# EAGLE board picoKey_2304 (EAGLE 9.6.2)
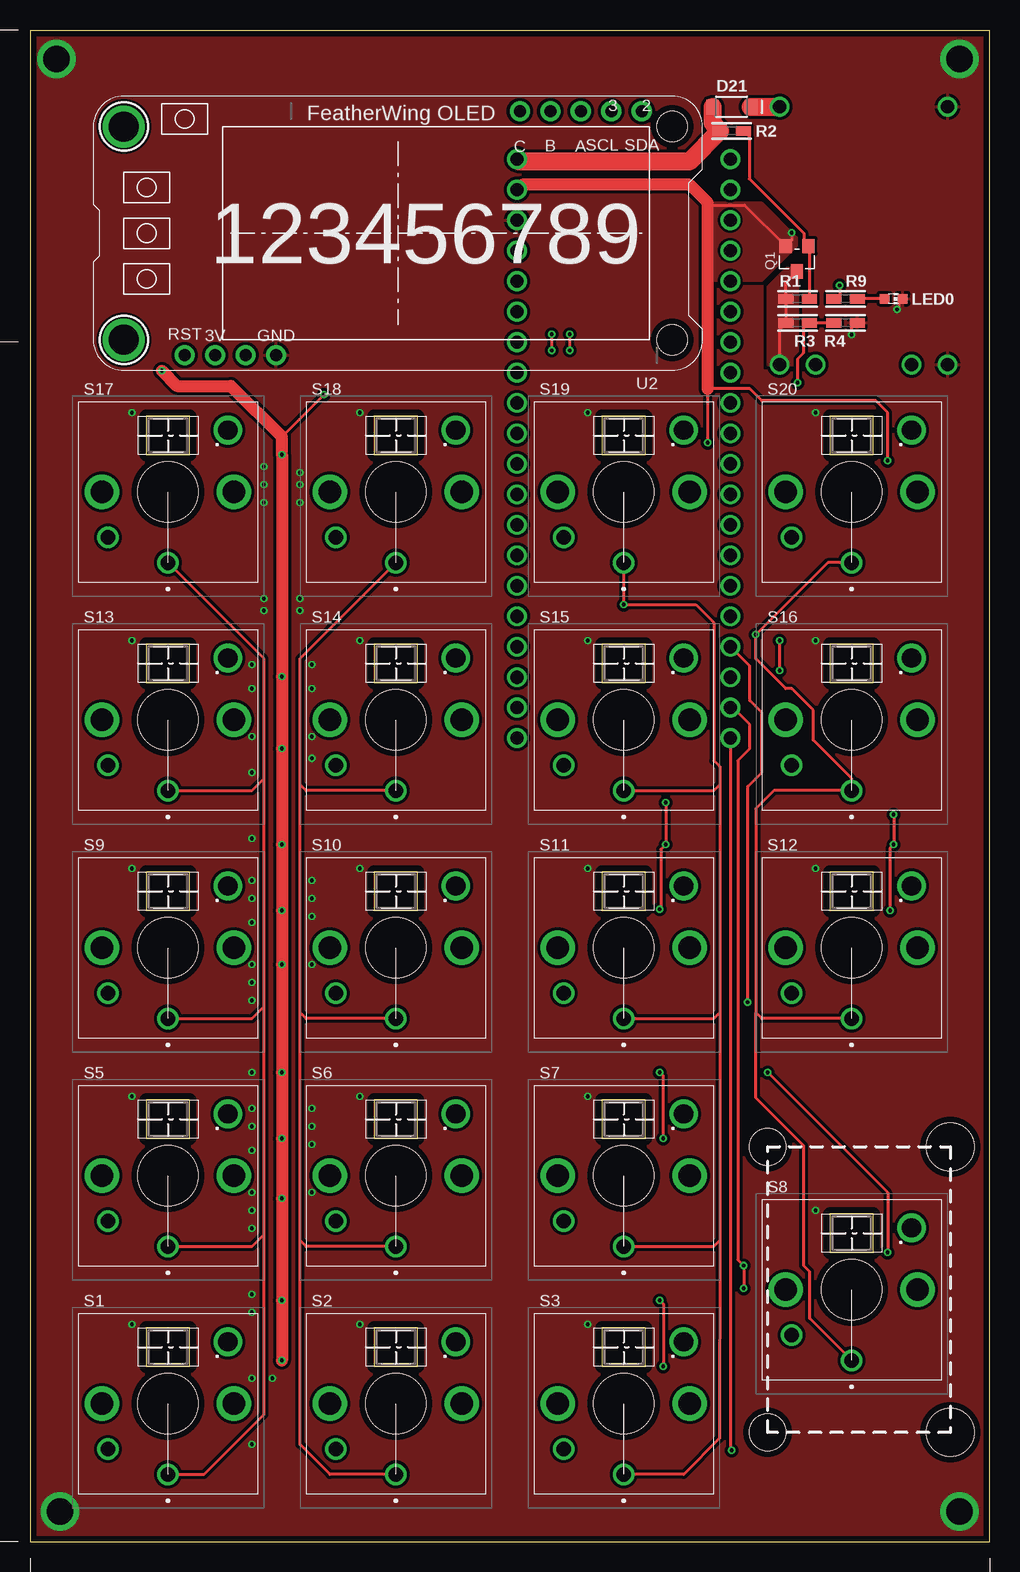
[diagram p0: board, top side]
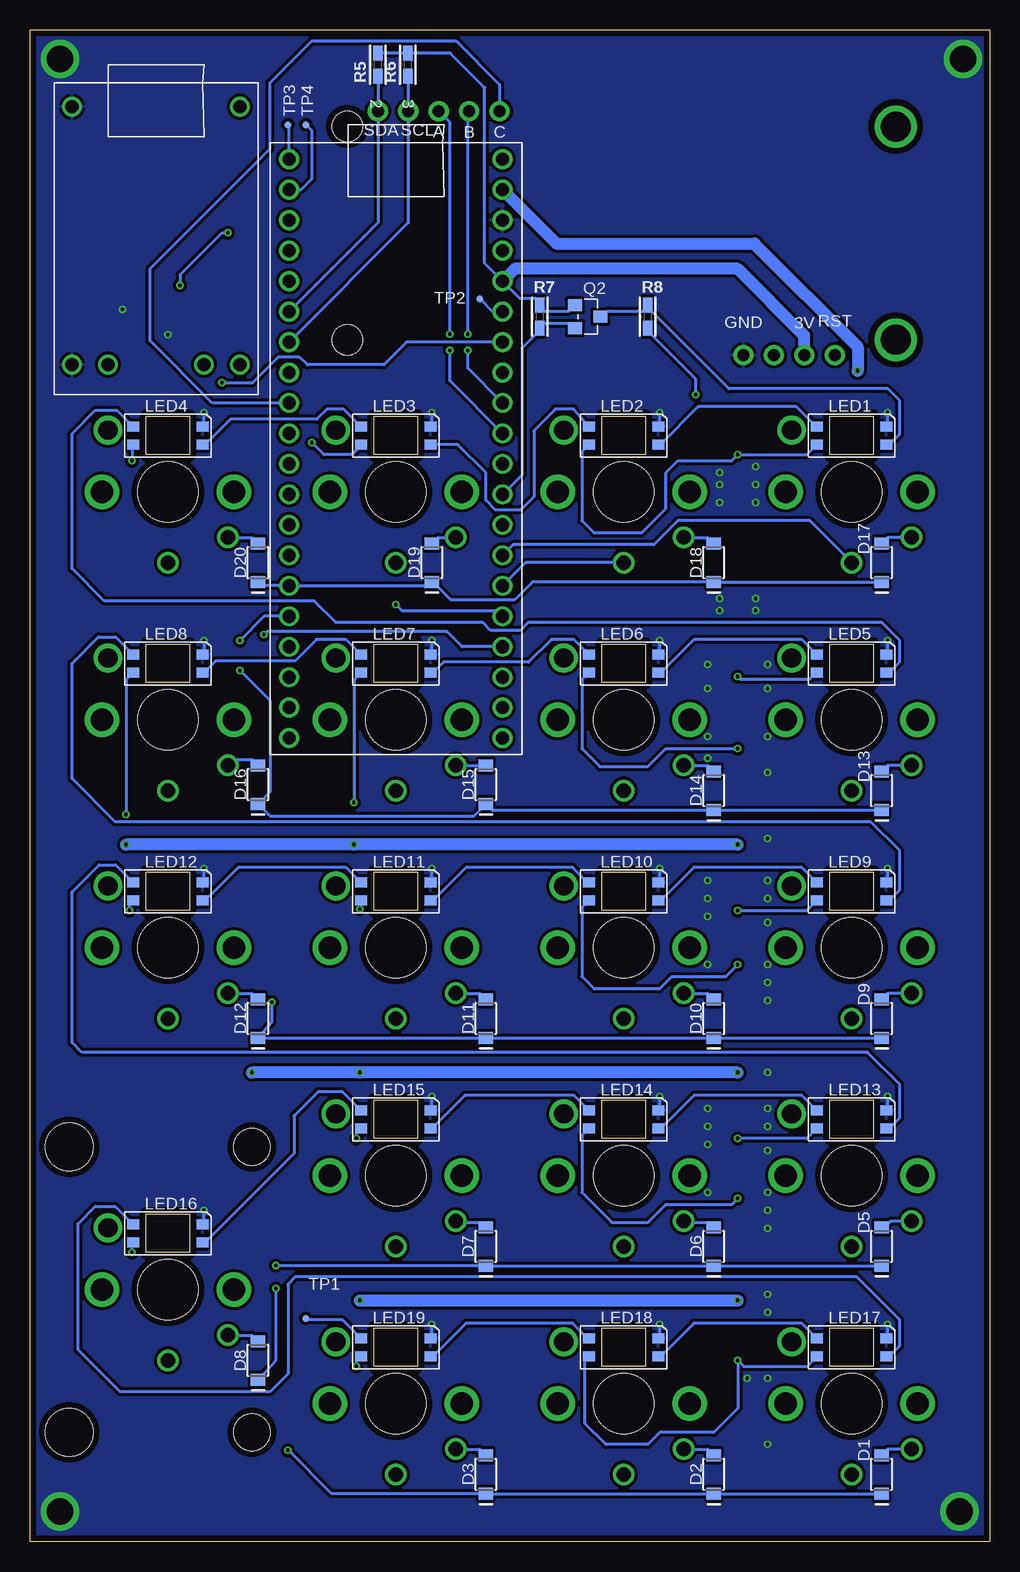
[diagram p1: board, bottom side, seen from below]

Size 80 x 126 mm. Coordinates in mm from the lower left corner, seen from the top.
Outline: 0,0 80,0 80,126 0,126 0,0
Copper layers (1*16): Top 0.035mm / dielectric 1.6mm / Bottom 0.035mm
Design rules "Elecrow_2-layer_PCB_eagle_rule": minimum track width 6mil, minimum drill 12mil, track to track 6mil, track to pad 8mil, pad to pad 12mil, via to via 12mil, smd to smd 0mil, copper to edge 20mil, drill to drill 10mil, minimum pad ring 6mil, minimum via ring 6mil, stop-mask expansion 0mil, vias tented up to drill 100mil, thermal gap 10mil

## Footprints (pad centres in the part's own frame; a part is rotated, then mirrored left to right if it is on the bottom)
SOD-123 = smd 1 x 1.2: A 1.6,0; K -1.6,0
SOD-123' = smd 1.2 x 1: A 0,-1.6; K 0,1.6
CHIP-LED0603 = smd 0.8 x 0.8: A 0,-0.75; C 0,0.75
SK6812MINIE-H = smd 1 x 0.82: 1 2.9,0.75; 2 2.9,-0.75; 3 -2.9,-0.75; 4 -2.9,0.75
SOT-23 = smd 1.016 x 1.2: 1 0.95,-1.06; 2 0,1.06; 3 -0.95,-1.06
R0603 = smd 1.25 x 0.8: 1 -0.965,0; 2 0.965,0
KAILH_CHOC_V2 = drill 1.2: 1 0,0; 2 -5,2.1 | drill 1.6: MH1 5,11.05 | drill 1.9: MH2 5.5,5.9; MH3 -5.5,5.9 | hole 5: 0,5.9
TP06R = smd 0.6 x 0.6: TP 0,0
CHG-4056 = drill 1.1 pad 1.6: BAT+ 4,-10.5; BAT- -4,-10.5; IN+ 7,11; IN- -7,11; OUT+ 7,-10.5; OUT- -7,-10.5
FEATHER_WING_OLED = drill 1 pad 1.676: 13 -30.48,0; 14 -33.02,0; 15 -35.56,0; 16 -38.1,0; 24 -10.16,20.32; 25 -7.62,20.32; 26 -5.08,20.32; 27 -2.54,20.32; 28 0,20.32 | drill 2.5 pad 3.2: P$1 -43.18,19.05; P$2 -43.18,1.27 | hole 2.54: 2.54,19.05; 2.54,1.27
STABILIZER = hole 4: -11.9,-8.24; 11.9,-8.24 | hole 3.05: 11.9,7; -11.9,7
RASPBERRYPI_PICO_RPI_PICO_MY = drill 1.1 pad 1.6: 3V3 8.89,13.97; 3V3_EN 8.89,16.51; ADC_VREF 8.89,11.43; AGND 8.89,6.35; GND@1 -8.89,19.05; GND@2 -8.89,6.35; GND@3 -8.89,-6.35; GND@4 -8.89,-19.05; GND@6 8.89,-19.05; GND@7 8.89,-6.35; GND@8 8.89,19.05; GP0 -8.89,24.13; GP1 -8.89,21.59; GP2 -8.89,16.51; GP3 -8.89,13.97; GP4 -8.89,11.43; GP5 -8.89,8.89; GP6 -8.89,3.81; GP7 -8.89,1.27; GP8 -8.89,-1.27; GP9 -8.89,-3.81; GP10 -8.89,-8.89; GP11 -8.89,-11.43; GP12 -8.89,-13.97; GP13 -8.89,-16.51; GP14 -8.89,-21.59; GP15 -8.89,-24.13; GP16 8.89,-24.13; GP17 8.89,-21.59; GP18 8.89,-16.51; GP19 8.89,-13.97; GP20 8.89,-11.43; GP21 8.89,-8.89; GP22 8.89,-3.81; GP26_A0 8.89,1.27; GP27_A1 8.89,3.81; GP28_A2 8.89,8.89; RUN 8.89,-1.27; VBUS 8.89,24.13; VSYS 8.89,21.59

## Placement (x,y rotation side)
D1  1N4148WS123  [SOD-123]  9,5.6 90 bottom
D2  1N4148WS123  [SOD-123]  23,5.6 90 bottom
D3  1N4148WS123  [SOD-123]  42,5.6 90 bottom
D5  1N4148WS123  [SOD-123]  9,24.6 90 bottom
D6  1N4148WS123  [SOD-123]  23,24.6 90 bottom
D7  1N4148WS123  [SOD-123]  42,24.6 90 bottom
D8  1N4148WS123  [SOD-123]  61,15.1 90 bottom
D9  1N4148WS123  [SOD-123]  9,43.6 90 bottom
D10  1N4148WS123  [SOD-123]  23,43.6 90 bottom
D11  1N4148WS123  [SOD-123]  42,43.6 90 bottom
D12  1N4148WS123  [SOD-123]  61,43.6 90 bottom
D13  1N4148WS123  [SOD-123]  9,62.6 90 bottom
D14  1N4148WS123  [SOD-123]  23,62.6 90 bottom
D15  1N4148WS123  [SOD-123]  42,63.1 90 bottom
D16  1N4148WS123  [SOD-123]  61,63.1 90 bottom
D17  1N4148WS123  [SOD-123]  9,81.6 90 bottom
D18  1N4148WS123  [SOD-123]  23,81.6 90 bottom
D19  1N4148WS123  [SOD-123]  46.5,81.6 90 bottom
D20  1N4148WS123  [SOD-123]  61,81.6 90 bottom
D21  1N4148WS  [SOD-123']  58.5,119.6 270 top
LED0  [CHIP-LED0603]  72,103.6 270 top
LED1  SK6812MINI-EH  [SK6812MINIE-H]  11.5,92.2 180 bottom
LED2  SK6812MINI-EH  [SK6812MINIE-H]  30.5,92.2 180 bottom
LED3  SK6812MINI-EH  [SK6812MINIE-H]  49.5,92.2 180 bottom
LED4  SK6812MINI-EH  [SK6812MINIE-H]  68.5,92.2 180 bottom
LED5  SK6812MINI-EH  [SK6812MINIE-H]  11.5,73.2 180 bottom
LED6  SK6812MINI-EH  [SK6812MINIE-H]  30.5,73.2 180 bottom
LED7  SK6812MINI-EH  [SK6812MINIE-H]  49.5,73.2 180 bottom
LED8  SK6812MINI-EH  [SK6812MINIE-H]  68.5,73.2 180 bottom
LED9  SK6812MINI-EH  [SK6812MINIE-H]  11.5,54.2 180 bottom
LED10  SK6812MINI-EH  [SK6812MINIE-H]  30.5,54.2 180 bottom
LED11  SK6812MINI-EH  [SK6812MINIE-H]  49.5,54.2 180 bottom
LED12  SK6812MINI-EH  [SK6812MINIE-H]  68.5,54.2 180 bottom
LED13  SK6812MINI-EH  [SK6812MINIE-H]  11.5,35.2 180 bottom
LED14  SK6812MINI-EH  [SK6812MINIE-H]  30.5,35.2 180 bottom
LED15  SK6812MINI-EH  [SK6812MINIE-H]  49.5,35.2 180 bottom
LED16  SK6812MINI-EH  [SK6812MINIE-H]  68.5,25.7 180 bottom
LED17  SK6812MINI-EH  [SK6812MINIE-H]  11.5,16.2 180 bottom
LED18  SK6812MINI-EH  [SK6812MINIE-H]  30.5,16.2 180 bottom
LED19  SK6812MINI-EH  [SK6812MINIE-H]  49.5,16.2 180 bottom
Q1  [SOT-23]  63.95,106.92 180 top
Q2  [SOT-23]  33.5,102.1 270 bottom
R1  100k  [R0603]  64,103.6 0 top
R2  100R  [R0603]  58.5,117.6 180 top
R3  200k  [R0603]  64,101.6 180 top
R4  100k  [R0603]  68,101.6 180 top
R5  4.7k  [R0603]  51,123.1 90 bottom
R6  4.7k  [R0603]  48.5,123.1 90 bottom
R7  100k  [R0603]  37.5,102.1 270 bottom
R8  100k  [R0603]  28.5,102.1 90 bottom
R9  1k  [R0603]  68,103.6 0 top
S1  CPG135001D02V2  [KAILH_CHOC_V2]  11.5,5.6 0 top
S2  CPG135001D02V2  [KAILH_CHOC_V2]  30.5,5.6 0 top
S3  CPG135001D02V2  [KAILH_CHOC_V2]  49.5,5.6 0 top
S5  CPG135001D02V2  [KAILH_CHOC_V2]  11.5,24.6 0 top
S6  CPG135001D02V2  [KAILH_CHOC_V2]  30.5,24.6 0 top
S7  CPG135001D02V2  [KAILH_CHOC_V2]  49.5,24.6 0 top
S8  CPG135001D02V2  [KAILH_CHOC_V2]  68.5,15.1 0 top
S9  CPG135001D02V2  [KAILH_CHOC_V2]  11.5,43.6 0 top
S10  CPG135001D02V2  [KAILH_CHOC_V2]  30.5,43.6 0 top
S11  CPG135001D02V2  [KAILH_CHOC_V2]  49.5,43.6 0 top
S12  CPG135001D02V2  [KAILH_CHOC_V2]  68.5,43.6 0 top
S13  CPG135001D02V2  [KAILH_CHOC_V2]  11.5,62.6 0 top
S14  CPG135001D02V2  [KAILH_CHOC_V2]  30.5,62.6 0 top
S15  CPG135001D02V2  [KAILH_CHOC_V2]  49.5,62.6 0 top
S16  CPG135001D02V2  [KAILH_CHOC_V2]  68.5,62.6 0 top
S17  CPG135001D02V2  [KAILH_CHOC_V2]  11.5,81.6 0 top
S18  CPG135001D02V2  [KAILH_CHOC_V2]  30.5,81.6 0 top
S19  CPG135001D02V2  [KAILH_CHOC_V2]  49.5,81.6 0 top
S20  CPG135001D02V2  [KAILH_CHOC_V2]  68.5,81.6 0 top
TP1  TPTP06R  [TP06R]  57,18.6 0 bottom
TP2  TPTP06R  [TP06R]  42.5,103.6 0 bottom
TP3  TPTP06R  [TP06R]  58.5,118.1 90 bottom
TP4  TPTP06R  [TP06R]  57,118.1 90 bottom
U1  CHG-4056  [CHG-4056]  69.5,108.6 0 bottom
U2  FEATHER_WING_OLED  [FEATHER_WING_OLED]  51,98.9 0 top
U$1  [STABILIZER]  68.5,21 90 top
X1  [RASPBERRYPI_PICO_RPI_PICO_MY]  49.5,91.1 0 bottom

## Library data of the parts
D1-D3 D5-D20 = SamacSys_Parts
D21 LED0 Q1 Q2 R1-R9 = Miya_IC
LED1-LED19 S1-S3 S5-S20 U1 U2 U$1 X1 = picoKey
TP1-TP4 = testpad

## Nets
3V3: Q2.3 R5.2 R6.2 R7.1 U2.15 X1.3V3
4.2V: Q1.2 R1.1 R3.2 U1.OUT+
A_BTN: U2.26 X1.GP26_A0
AD2: R3.1 R4.2 X1.GP28_A2
B_BTN: U2.25 X1.GP27_A1
C_BTN: U2.24 X1.GP6
COL1: S1.1 S5.1 S9.1 S13.1 S17.1 X1.GP21
COL2: S2.1 S6.1 S10.1 S14.1 S18.1 X1.GP20
COL3: S3.1 S7.1 S11.1 S15.1 S19.1 X1.GP19
COL4: S8.1 S12.1 S16.1 S20.1 X1.GP18
GND: LED0.C LED1.3 LED2.3 LED3.3 LED4.3 LED5.3 LED6.3 LED7.3 LED8.3 LED9.3 LED10.3 LED11.3 LED12.3 LED13.3 LED14.3 LED15.3 LED16.3 LED17.3 LED18.3 LED19.3 R4.1 U1.IN- U1.OUT- U2.13 X1.GND@8
LED: Q2.1 R7.2 X1.GP22
LED1: LED1.4 Q2.2 R8.2
LED2: LED1.2 LED2.4
LED3: LED2.2 LED3.4
LED4: LED3.2 LED4.4
LED5: LED4.2 LED5.4
LED6: LED5.2 LED6.4
LED7: LED6.2 LED7.4
LED8: LED7.2 LED8.4
LED9: LED8.2 LED9.4
LED10: LED9.2 LED10.4
LED11: LED10.2 LED11.4
LED12: LED11.2 LED12.4
LED13: LED12.2 LED13.4
LED14: LED13.2 LED14.4
LED15: LED14.2 LED15.4
LED16: LED15.2 LED16.4
LED17: LED16.2 LED17.4
LED18: LED17.2 LED18.4
LED19: LED18.2 LED19.4
LED20: LED19.2 TP1.TP
N$5: D1.A S1.2
N$6: D2.A S2.2
N$7: D3.A S3.2
N$9: D5.A S5.2
N$10: D6.A S6.2
N$11: D7.A S7.2
N$12: D8.A S8.2
N$13: D9.A S9.2
N$14: D10.A S10.2
N$15: D11.A S11.2
N$16: D12.A S12.2
N$17: D13.A S13.2
N$18: D14.A S14.2
N$19: D15.A S15.2
N$20: D16.A S16.2
N$21: D17.A S17.2
N$22: D18.A S18.2
N$23: LED0.A R9.2
N$24: D20.A S20.2
N$25: D19.A S19.2
N$30: D21.A R2.2 X1.VBUS
N$32: D21.K U1.IN+
N$36: Q1.3 R1.2 R2.1
N$40: TP2.TP X1.ADC_VREF
ROW1: D1.K D2.K D3.K X1.GP15
ROW2: D5.K D6.K D7.K D8.K X1.GP14
ROW3: D9.K D10.K D11.K D12.K X1.GP13
ROW4: D13.K D14.K D15.K D16.K X1.GP12
ROW5: D17.K D18.K D19.K D20.K X1.GP11
RX: TP4.TP X1.GP1
SCL: R6.1 U2.27 X1.GP5
SDA: R5.1 U2.28 X1.GP4
TX: TP3.TP X1.GP0
VSYS: LED1.1 LED2.1 LED3.1 LED4.1 LED5.1 LED6.1 LED7.1 LED8.1 LED9.1 LED10.1 LED11.1 LED12.1 LED13.1 LED14.1 LED15.1 LED16.1 LED17.1 LED18.1 LED19.1 Q1.1 R8.1 R9.1 X1.VSYS

## Tracks (layer width: path | path; a pad name or v marks a point on that pad's centre or on a via)
3V3
  Bottom 0.25: Q2.3 35.05,102.56 37.1,102.56 37.5,102.97 R7.1 37.5,103.27 37.9,103.67 39.2,103.67 X1.3V3 42.1,106.56 42.1,121.2 44.97,124.06 R6.2 R5.2
  Bottom 1: U2.15 15.44,100.54 21,106.1 39.58,106.1 X1.3V3
4.2V
  Top 0.25: U1.OUT+ 62.5,101.06 R3.2 R1.1 63.03,104.94 Q1.2
  pour Top (isolate 0.2, no thermals): 61.5,98.1 64,98.1 64,106.1 63,106.1 61.5,104.6
A_BTN  (via drill 0.3)
  Top 0.25: v45,99.3 v45,100.65
  Bottom 0.25: X1.GP26_A0 45,96.76 v45,99.3 | v45,100.65 45,118.3 U2.26
AD2  (via drill 0.3)
  Top 0.25: R4.2 R3.1 64.86,101.6 64.47,101.2 64.47,99.06 64,98.6 v64,96.6
  Bottom 0.25: X1.GP28_A2 48.61,99.99 50.5,98.1 56.87,98.1 57.5,98.73 59.33,98.73 61.46,96.6 v64,96.6
B_BTN  (via drill 0.3)
  Top 0.25: v43.5,99.3 v43.5,100.65
  Bottom 0.25: X1.GP27_A1 43.5,97.8 v43.5,99.3 | v43.5,100.65 43.5,119.1 U2.25
C_BTN
  Bottom 0.25: X1.GP6 64.81,94.91 70,100.1 70,106.1 60,116.1 60,121.6 56.5,125.1 44.5,125.1 40.84,121.44 U2.24
COL1
  Top 0.25: S1.1 14.5,5.6 19.5,10.6 19.5,25.6 | S17.1 19.5,73.6 19.5,63.6 | 19.5,25.6 19.5,44.6 | 19.5,44.6 19.5,63.6 | S5.1 18.5,24.6 19.5,25.6 | S9.1 18.5,43.6 19.5,44.6 | S13.1 18.5,62.6 19.5,63.6
  Bottom 0.25: S17.1 15,85.1 26,85.1 28,83.1 39.72,83.1 X1.GP21
COL2
  Top 0.25: 22.5,25.1 22.5,44.1 | 22.5,44.1 22.5,63.1 | 22.5,63.1 22.5,73.6 S18.1 | S6.1 23,24.6 22.5,25.1 | S2.1 25,5.6 22.5,8.1 22.5,25.1 | S10.1 23,43.6 22.5,44.1 | S14.1 23,62.6 22.5,63.1
  Bottom 0.25: S18.1 38.68,81.6 X1.GP20
COL3  (via drill 0.3)
  Top 0.25: S19.1 v49.5,78.1 55.5,78.1 57,76.6 57,65.1 57.51,64.59 57.51,63.1 | S3.1 54.5,5.6 57.5,8.6 57.5,25.1 | 57.51,63.1 57.51,44.1 | 57.51,44.1 57.5,25.1 | S7.1 57,24.6 57.5,25.1 | S11.1 57.01,43.6 57.51,44.1 | S15.1 57.01,62.6 57.51,63.1
  Bottom 0.25: X1.GP19 41.08,77.6 49,77.6 v49.5,78.1
COL4  (via drill 0.3)
  Top 0.25: S20.1 66.5,81.6 v60.5,75.6 60.5,73.6 63,71.1 63.5,71.1 65.3,69.3 65.3,66.8 68.5,63.6 S16.1 62,62.6 60.5,61.1 60.5,44.1 | S8.1 65,18.6 65,22.5 64.5,23 64.5,33 60.5,37 60.5,44.1 | S12.1 61,43.6 60.5,44.1
  Bottom 0.25: X1.GP18 44,74.6 45.25,75.85 60.25,75.85 v60.5,75.6
GND  (via drill 0.3, 2.2)
  Top 0.25: LED0.C 72.45,103.3 72.45,102.85 v72.3,102.7 | R4.1 68.47,101.6 68.47,100.64 v68.5,100.6
  Bottom 0.25: LED1.3 8.5,93.25 v8.5,94.1 | LED2.3 27.5,93.25 v27.5,94.1 | LED3.3 46.5,93.25 v46.5,94.1 | LED4.3 65.5,93.25 v65.5,94.1 | v65.5,75.1 65.5,74 65.55,73.95 LED8.3 | LED7.3 46.61,73.99 46.5,74.1 v46.5,75.1 | LED6.3 27.5,74.25 v27.5,75.1 | LED5.3 8.5,74.25 v8.5,75.1 | LED12.3 65.5,55.25 v65.5,56.1 | LED11.3 46.5,55.25 v46.5,56.1 | LED10.3 27.5,55.25 v27.5,56.1 | LED9.3 8.5,55.25 v8.5,56.1 | LED13.3 8.5,36.25 v8.5,37.1 | LED14.3 27.5,36.25 v27.5,37.1 | LED15.3 46.5,36.25 v46.5,37.1 | LED16.3 65.5,26.75 v65.5,27.6 | LED19.3 46.5,17.25 v46.5,18.1 | LED18.3 27.5,17.25 v27.5,18.1 | LED17.3 8.5,17.25 v8.5,18.1
  other vias: 19.5,89.6 19.5,88.1 19.5,86.6 22.5,88.1 22.5,86.6 22.5,89.1 19.5,78.6 19.5,77.6 22.5,77.6 22.5,78.6 18.5,73.1 23.5,73.1 18.5,71.1 23.5,71.1 23.5,67.1 18.5,67.1 18.5,64.1 23.5,65.3 18.5,58.6 23.5,55.1 23.5,53.6 23.5,52.1 18.5,55.1 18.5,53.6 18.5,51.6 18.5,48.1 18.5,46.6 18.5,45.1 23.5,48.1 23.5,36.1 23.5,34.6 23.5,33.1 18.5,39.1 18.5,36.1 18.5,34.6 18.5,32.6 18.5,29.1 18.5,27.6 18.5,26.1 23.5,29.1 18.5,20.6 18.5,19.1 18.5,13.6 18.5,8.1 20.2,13.6 2.2,123.6 77.5,123.6 77.5,2.5 2.5,2.5
  pour Bottom (isolate 0.254, rank 6): 80,0 80,126 0,126 0,0
  pour Top (isolate 0.254, rank 6): 0,0 0,126 80,126 80,0
LED
  Bottom 0.152: R7.2 37.5,101
  Bottom 0.25: X1.GP22 39,88.9 39,99.5 37.5,101 | Q2.1 34.96,101.55 37.15,101.55 37.5,101.2 R7.2
LED1
  Bottom 0.25: Q2.2 32.27,102.1 31.8,102.56 28.8,102.56 28.5,102.86 | LED1.4 8.35,91.45 7.5,92.3 7.5,95.1 8.5,96.1 21.73,96.1 28.5,102.86 | R8.2 28.5,102.86
LED2
  Bottom 0.25: LED1.2 14.45,92.95 16.1,94.6 24.3,94.6 27.45,91.45 LED2.4
LED3
  Bottom 0.25: LED2.2 34.67,94.4 36.2,94.4 38,92.6 38,87.1 39.1,86 41.2,86 42,86.8 42,89.1 44.35,91.45 LED3.4
LED4
  Bottom 0.25: LED3.2 53.86,94.4 55.24,94.4 56.1,93.55 63.29,93.55 65.39,91.45 LED4.4
LED5
  Bottom 0.25: LED5.4 8.35,72.45 7.5,73.3 7.5,75.1 9,76.6 38.47,76.6 39.12,75.95 41.6,75.95 42.25,76.6 54.5,76.6 56.3,78.4 73.8,78.4 76.5,81.1 76.5,92.35 74.54,94.3 72.76,94.3 LED4.2
LED6
  Bottom 0.25: LED5.2 15.66,75.2 24.64,75.2 27.39,72.45 LED6.4
LED7
  Bottom 0.25: LED6.2 34.66,75.2 36.53,75.2 38.42,73.31 45.53,73.31 46.39,72.45 LED7.4
LED8
  Bottom 0.25: LED7.2 53.66,75.2 56.11,75.2 57.9,73.41 64.53,73.41 65.49,72.45 LED8.4
LED9
  Bottom 0.25: LED9.4 8.35,53.45 7.5,54.3 7.5,57.6 9.9,60 72.9,60 76.5,63.6 76.5,73.2 74.3,75.4 72.86,75.4 LED8.2
LED10
  Bottom 0.25: LED10.4 27.4,53.45 24.65,56.2 15.66,56.2 LED9.2
LED11
  Bottom 0.25: LED10.2 33.5,54.95 34.76,56.2 43.63,56.2 46.39,53.45 LED11.4
LED12
  Bottom 0.25: LED11.2 53.66,56.2 62.63,56.2 65.39,53.45 LED12.4
LED13
  Bottom 0.25: LED13.4 8.35,34.45 7.5,35.3 7.5,38.1 10.18,40.78 75.68,40.78 76.5,41.6 76.5,54.15 74.24,56.4 72.86,56.4 LED12.2
LED14
  Bottom 0.25: LED13.2 15.66,37.2 24.64,37.2 27.39,34.45 LED14.4
LED15
  Bottom 0.25: LED15.4 46.49,34.45 43.73,37.2 34.66,37.2 LED14.2
LED16
  Bottom 0.25: LED16.4 65.4,24.95 58,32.35 58,35.5 56,37.5 53.95,37.5 LED15.2
LED17
  Bottom 0.25: LED16.2 72.9,27.95 74.55,27.95 76,26.5 76,16 72.5,12.5 60,12.5 58.5,14 58.5,21.45 57.9,22.05 11.05,22.05 7.5,18.5 7.5,16.3 8.35,15.45 LED17.4
LED18
  Bottom 0.25: LED17.2 15.66,18.2 24.65,18.2 27.4,15.45 LED18.4
LED19
  Bottom 0.25: LED18.2 33.5,16.95 34.76,18.2 43.65,18.2 46.4,15.45 LED19.4
LED20
  Bottom 0.25: LED19.2 53.93,18.48 56.88,18.48 TP1.TP
N$5
  Bottom 0.25: S1.2 8.5,7.7 D1.A
N$6
  Bottom 0.25: S2.2 23.5,7.7 D2.A
N$7
  Bottom 0.25: S3.2 42.5,7.7 D3.A
N$9
  Bottom 0.25: S5.2 8.25,26.7 9,25.95 D5.A
N$10
  Bottom 0.25: S6.2 25.4,26.6 23.4,26.6 D6.A
N$11
  Bottom 0.25: S7.2 44.4,26.6 42.4,26.6 D7.A
N$12
  Bottom 0.25: S8.2 61.5,17.2 D8.A
N$13
  Bottom 0.25: S9.2 8.5,45.7 D9.A
N$14
  Bottom 0.25: S10.2 23.5,45.7 D10.A
N$15
  Bottom 0.25: S11.2 42.5,45.7 D11.A
N$16
  Bottom 0.25: S12.2 61.5,45.7 D12.A
N$17
  Bottom 0.25: D13.A 8.5,64.7 S13.2
N$18
  Bottom 0.25: S14.2 23.5,64.7 D14.A
N$19
  Bottom 0.25: S15.2 D15.A
N$20
  Bottom 0.25: S16.2 63,65.2 61.5,65.2 D16.A
N$21
  Bottom 0.25: S17.2 8.5,83.7 D17.A
N$22
  Bottom 0.25: S18.2 23.5,83.7 D18.A
N$23
  Top 0.25: LED0.A R9.2
N$24
  Bottom 0.25: S20.2 61.5,83.7 D20.A
N$25
  Bottom 0.25: D19.A 46,83.7 S19.2
N$30
  Top 1.5: D21.A 56.9,118.23 R2.2 54.97,115.03 40.81,115.03 X1.VBUS
N$32
  Top 1.5: D21.K U1.IN+
N$36
  Top 0.25: R1.2 64.97,107.71 65.18,107.72 65.02,107.86 Q1.3 64.5,108.38 64.5,109.06 59.97,113.6 59.97,117.1 R2.1
N$40
  Bottom 0.25: TP2.TP 41.43,102.53 X1.ADC_VREF
ROW1  (via drill 0.3)
  Top 0.25: X1.GP15 58.39,7.71 v58.5,7.6
  Bottom 0.25: D1.K D2.K D3.K 54.84,4 58.44,7.6 v58.5,7.6
ROW2  (via drill 0.3)
  Top 0.25: X1.GP14 58.59,69.51 60,68.1 60,66.1 59,65.1 59,23.5 v59.5,23 v59.5,21.1
  Bottom 0.25: D5.K D6.K D7.K v59.5,23 | D8.K 60.5,14 59.5,15.11 v59.5,21.1
ROW3  (via drill 0.3)
  Top 0.25: v59.84,44.95 59.84,62.94 61,64.1 61,69.1 60,70.1 60,72.98 X1.GP13
  Bottom 0.25: D9.K D10.K D11.K D12.K 59.84,43.3 v59.84,44.95
ROW4  (via drill 0.3)
  Top 0.25: v62.5,72.6 v62.5,75.1
  Bottom 0.25: D13.K D14.K 41.5,61 D15.K 43,60.5 60,60.5 D16.K 60,62.5 60,70.1 v62.5,72.6 | X1.GP12 60.47,77.13 v62.5,75.1
ROW5
  Bottom 0.25: D17.K D18.K 38.12,80 39.62,78.49 44.9,78.49 46.41,80 D19.K 46.51,79.67 X1.GP11 60.89,79.67 D20.K
RX
  Bottom 0.25: X1.GP1 57.41,112.69 56.5,113.6 56.5,117.6 TP4.TP
SCL
  Bottom 0.25: R6.1 48.5,119.26 U2.27 48.46,109.92 X1.GP5
SDA
  Bottom 0.25: R5.1 U2.28 51,109.92 X1.GP4
TX
  Bottom 0.25: X1.GP0 58.39,117.99 TP3.TP
VSYS  (via drill 0.3)
  Top 0.25: 21,92.1 v24.5,95.6 | v52.5,52.7 52.6,52.8 52.6,57.7 v53,58.1 v53,61.6 | v71.7,52.6 71.7,57.8 v72,58.1 v72,60.6 | v52.8,33.6 52.8,38.8 v52.5,39.1 | v71.5,24.1 71.5,29.1 v61.5,39.1 | v52.5,20.1 52.8,19.8 v52.8,14.6 | v56.5,91.6 56.5,96.1 60,96.1 61,95.1 70.5,95.1 71.5,94.1 v71.5,90.1 | 56.5,111.6 56.7,111.4 59.58,111.4 Q1.1 63.5,108.48 v63.5,109.1 | R9.1 67.44,103.6 67.53,103.7 67.53,104.7 v67.5,104.7
  Top 1: v21,15.1 v21,20.1 v21,28.6 v21,33.6 v21,39.1 v21,48.1 v21,52.6 v21,58.1 v21,66.1 v21,72.1 v21,90.6 21,92.1 16.77,96.33 12.25,96.33 11,97.58 v11,97.6 | X1.VSYS 41.01,113.09 55.01,113.09 56.5,111.6 56.5,96.1
  Bottom 0.25: LED17.1 14.4,15.4 15.2,14.6 20.5,14.6 v21,15.1 21,11.1 23,9.1 27.5,9.1 28.5,8.1 32,8.1 33.73,9.82 33.73,15.12 LED18.1 | LED13.1 15.25,33.6 v21,33.6 | LED9.1 15.25,52.6 v21,52.6 | v21,72.1 20.8,71.9 15,71.9 14.45,72.45 LED5.1 | LED1.1 15.25,90.6 v21,90.6 21.5,90.1 26,90.1 27,89.1 27,86.1 29,84.1 33,84.1 34,85.1 34,90.85 LED2.1 | LED14.1 34,33.85 34,29.1 31.5,26.6 28.5,26.6 27,28.1 21.5,28.1 v21,28.6 | LED10.1 34,52.85 34,47.1 33,46.1 27.5,46.1 26.5,47.1 22,47.1 v21,48.1 | LED6.1 34,71.85 34,66.1 32.5,64.6 28.5,64.6 27,66.1 v21,66.1 | LED6.1 | v24.5,95.6 24.5,96.9 28.5,100.9 R8.1 | v52.5,52.7 52.5,53.35 LED11.1 | v71.7,52.6 71.7,53.15 LED12.1 | LED15.1 52.8,34.05 v52.8,33.6 | LED16.1 71.5,24.85 v71.5,24.1 | LED19.1 52.8,15.05 v52.8,14.6 | LED8.1 72,71.85 v72,60.6 | LED7.1 52.4,72.4 53,71.8 v53,61.6 | LED3.1 53.12,90.6 55.5,90.6 v56.5,91.6 | LED4.1 71.5,91.15 v71.5,90.1 | v63.5,109.1 64,109.1 67.5,105.6 v67.5,104.7
  Bottom 1: X1.VSYS 36.11,108.19 19.59,108.19 11,99.6 v11,97.6 | v21,58.1 v53,58.1 v72,58.1 | v21,39.1 v52.5,39.1 v61.5,39.1 | v52.5,20.1 v21,20.1
  pour Top (isolate 0.2, no thermals): 56.5,111.6 61,111.6 63.9,108.7 63.9,108 61,105.1 56.5,105.1